# Altium PCB CDRon_PCB.PcbDoc
Units mil, origin at the board's own origin, x right, y up, seen from the top; angles counter-clockwise.
Board outline 3385 x 5400 mil, 2 copper layers (Top Layer, Bottom Layer); 12 components, 56 nets, 129 pads, 0 vias.
Unrouted connection lines stored in the file: 38.
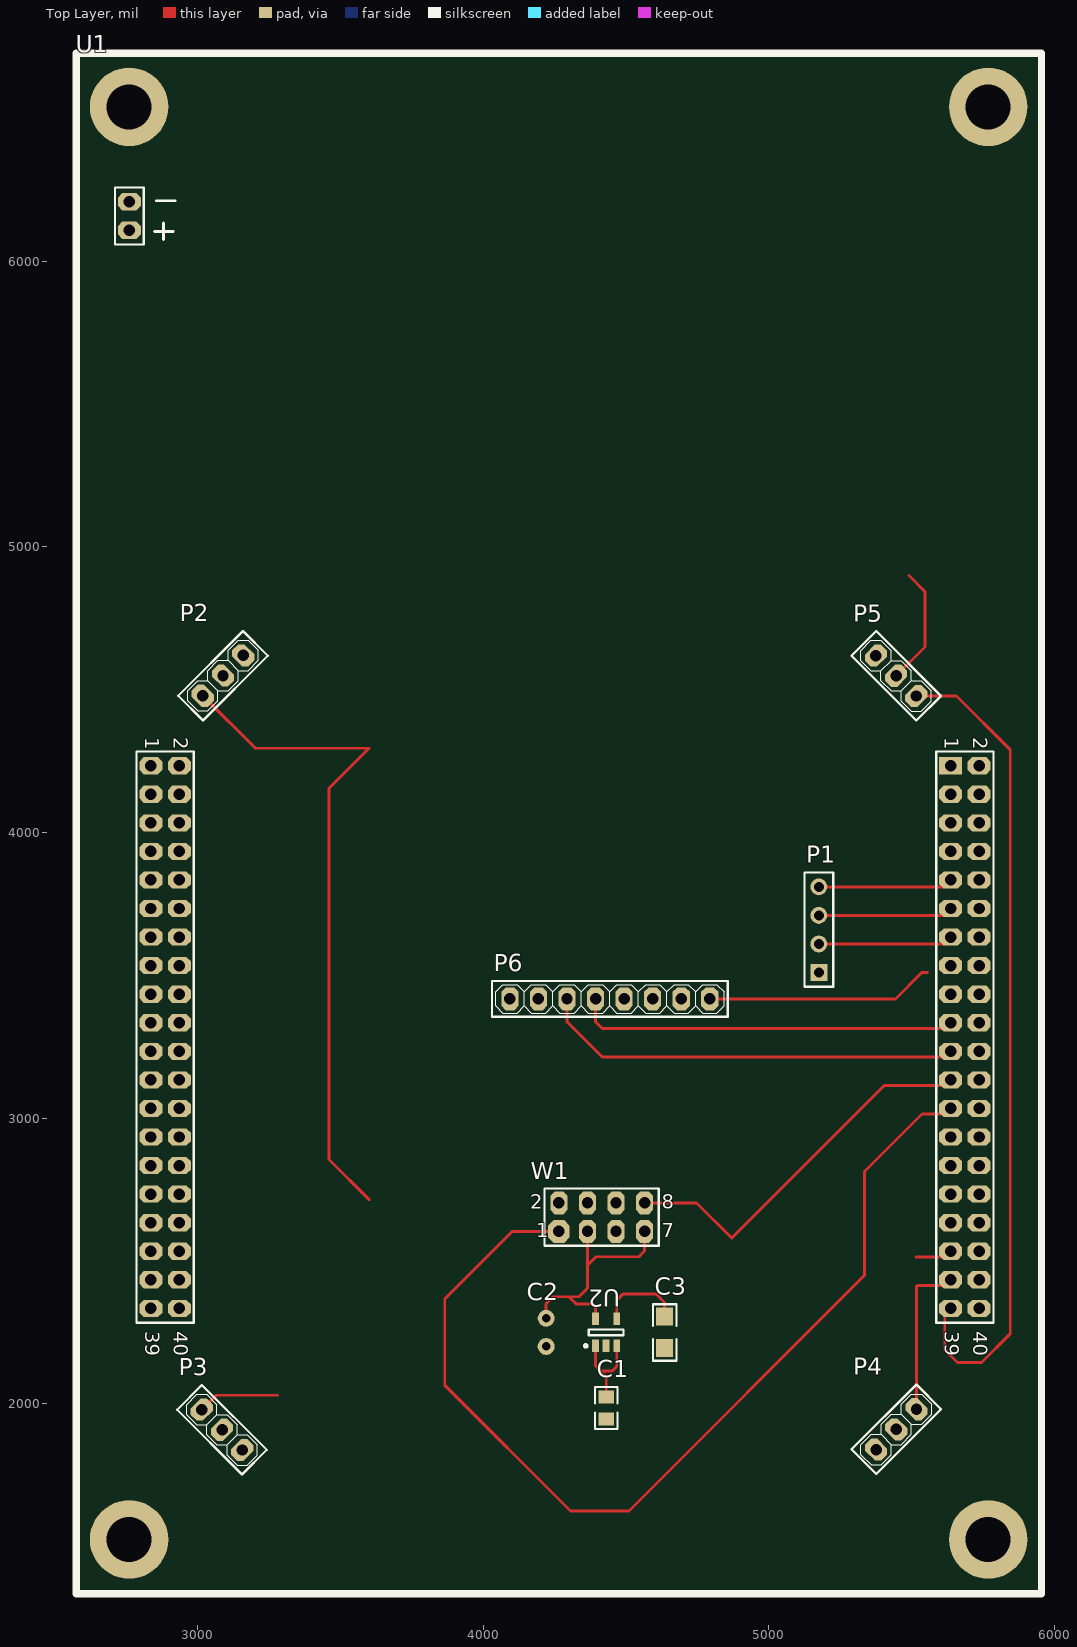
[diagram p0: Top Layer view]
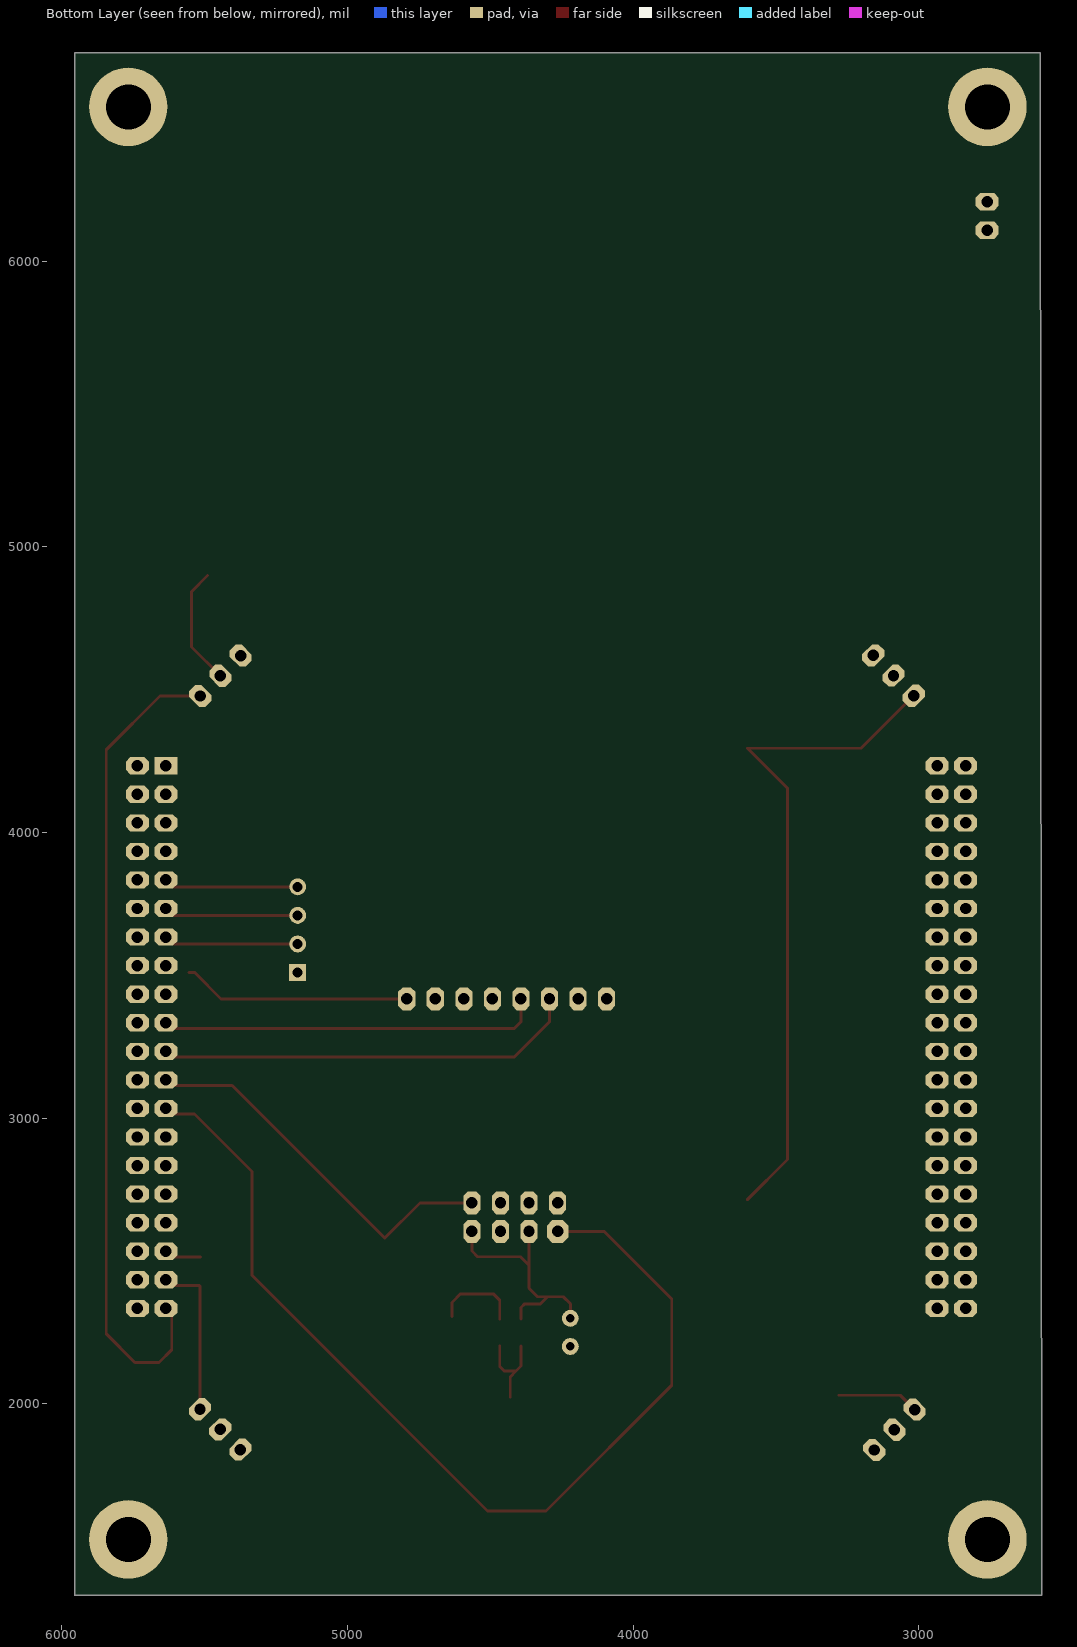
[diagram p1: Bottom Layer view, seen from below]

## Layer stack, top to bottom
Top Solder: solder mask 0.4, Solder Resist, Dk 3.5
Top Layer: signal copper 1.4
Dielectric 1: dielectric 12.6, FR-4, Dk 4.8
Bottom Layer: signal copper 1.4
Bottom Solder: solder mask 0.4, Solder Resist, Dk 3.5

## Board outline
2570,1330 5955,1330 5955,6730 2575,6730

## Design rules (kind name [scope] priority, off if disabled: settings)
Clearance [All] p1 off: gap=0
ComponentClearance [All] p1 off: gap=10 collisioncheckmode=3 verticalgap=10 showdistances=FALSE
PolygonConnect [All] p1: connectstyle=Relief reliefconductorwidth=10 reliefentries=4 polygonreliefangle="90 Angle" airgapwidth=10
RoutingVias [All] p1: holewidth=28 width=50 viastyle="Through Hole" minholewidth=28 minwidth=50 maxholewidth=28 maxwidth=50
SolderMaskExpansion [All] p1: expansion=4
Width [All] p1: maxlimit=10 minlimit=10 preferedwidth=10
29 further rules are at their usual default settings.

## Classes and differential pairs
component class CDRon_brushless: P2 P3 P4 P5
component class CDRon_IMU-BAT: P1 P6
component class CDRon_wifi: C1 C2 C3 U2 W1

## Components (designator, comment, footprint, x,y, rotation, side; value= is the part's Value field where it differs from the comment)
C1 "C1u" 0805 4430,1985 r90 top
C2 "C2.2u" TANTALUM 4220,2250 r270 top
C3 "C10n" "C 1206" 4635,2250 r90 top
P1 "Battery" HDR1X4 5175,3510 r90 top
P2 "ESC" ESC 3087.6,4549.29 r225 top
P3 "ESC" ESC 3085,1910 r135 top
P4 "ESC" ESC 5447.4,1910.71 r45 top
P5 "ESC" ESC 5445.71,4547.6 r315 top
P6 "GY-521" GY-521 4445,3415 r0 top
U1 "EDU-CIAA" EDU-CIAA 2575,1335 r0 top
U2 "LP2985-33DBVR" TI-DBV5_N 4430,2250 r90 top
W1 "ESP8266" ESP8266 4415,2650 r0 top

## Footprints (in the part's own frame and the unit in brackets; to place one, negate y for a bottom-side part, rotate by r counter-clockwise, add the part's x,y. Pads: shape width x height; smd on the part's side, far side on the other; paste and mask are expansions set on the pad)
0805 [mm]
  rect 1.15x1.4 smd: 1(-0.964,-0.019) 2(0.991,-0.019)
  silkscreen extent -1.85,-1.02 1.88,0.98, body extent -1.02,-0.62 0.98,0.63, height 0.78
"C 1206" [mm]
  rect 1.6x1.5 smd: 1(-1.4,0) 2(1.4,0)
  silkscreen extent -2.51,-1.05 2.5,1.03, body extent -1.54,-0.8 1.66,0.8, height 0.77
EDU-CIAA [mil]
  round 275 hole 157.48: 0(185.1,190) 0(185.1,5205.75) 0(3192.97,190) 0(3192.97,5205.75)
  rect 80x60 hole 40: 1(3061.07,2899.1)
  oct 80x60 hole 40: 2(3161.07,2899.1) 3(3061.07,2799.1) 4(3161.07,2799.1) 5(3061.07,2699.1) 6(3161.07,2699.1) 7(3061.07,2599.1) 8(3161.07,2599.1) 9(3061.07,2499.1) 10(3161.07,2499.1) 11(3061.07,2399.1) 12(3161.07,2399.1) 13(3061.07,2299.1) 14(3161.07,2299.1) 15(3061.07,2199.1) 16(3161.07,2199.1) 17(3061.07,2099.1) 18(3161.07,2099.1) 19(3061.07,1999.1) 20(3161.07,1999.1) 21(3061.07,1899.1) 22(3161.07,1899.1) 23(3061.07,1799.1) 24(3161.07,1799.1) 25(3061.07,1699.1) 26(3161.07,1699.1) 27(3061.07,1599.1) 28(3161.07,1599.1) 29(3061.07,1499.1) 30(3161.07,1499.1) 31(3061.07,1399.1) 32(3161.07,1399.1) 33(3061.07,1299.1) 34(3161.07,1299.1) 35(3061.07,1199.1) 36(3161.07,1199.1) 37(3061.07,1099.1) 38(3161.07,1099.1) 39(3061.07,999.1) 40(3161.07,999.1) 41(261.1,2899.1) 42(361.1,2899.1) 43(261.1,2799.1) 44(361.1,2799.1) 45(261.1,2699.1) 46(361.1,2699.1) 47(261.1,2599.1) 48(361.1,2599.1) 49(261.1,2499.1) 50(361.1,2499.1) 51(261.1,2399.1) 52(361.1,2399.1) 53(261.1,2299.1) 54(361.1,2299.1) 55(261.1,2199.1) 56(361.1,2199.1) 57(261.1,2099.1) 58(361.1,2099.1) 59(261.1,1999.1) 60(361.1,1999.1) 61(261.1,1899.1) 62(361.1,1899.1) 63(261.1,1799.1) 64(361.1,1799.1) 65(261.1,1699.1) 66(361.1,1699.1) 67(261.1,1599.1) 68(361.1,1599.1) 69(261.1,1499.1) 70(361.1,1499.1) 71(261.1,1399.1) 72(361.1,1399.1) 73(261.1,1299.1) 74(361.1,1299.1) 75(261.1,1199.1) 76(361.1,1199.1) 77(261.1,1099.1) 78(361.1,1099.1) 79(261.1,999.1) 80(361.1,999.1) 81(185.97,4773.86) 82(185.97,4873.86)
  silkscreen extent 0,0 3379,5394, body extent 0,0 3379,5395, height 335
ESC [mil]
  oct 60x80 hole 40: 1(-1.1,0.6) 2(-101.1,0.6) 3(98.9,0.6)
  silkscreen extent -161,-60 160,62
ESP8266 [mil]
  oct 75x80 hole 40: 1(-150.2,-46.6)
  oct 60x80 hole 40: 2(-150.2,53.4) 3(-50.2,-46.6) 4(-50.2,53.4) 5(49.8,-46.6) 6(49.8,53.4) 7(149.8,-46.6) 8(149.8,53.4)
  silkscreen extent -200,-97 200,103
GY-521 [mil]
  oct 60x80 hole 40: 1(-351.9,2.8) 2(-251.9,2.8) 3(-151.9,2.8) 4(-51.9,2.8) 5(48.1,2.8) 6(148.1,2.8) 7(248.1,2.8) 8(348.1,2.8)
  silkscreen extent -415,-60 411,66
HDR1X4 [mm] "Connector; Header; 4 Position"
  rect 1.5x1.5 hole 0.9: 1(0,0)
  round 1.5 hole 0.9: 2(2.54,0) 3(5.08,0) 4(7.62,0)
  silkscreen extent -1.27,-1.27 8.89,1.27
TANTALUM [mm]
  round 1.5 hole 0.75: 1(-1.25,0) 2(1.25,0)
  body extent -1.98,-1.98 1.98,1.98, height 7.39
TI-DBV5_N [mm] "SOT23, 5-Leads, Body 2.9x1.6mm, Pitch 0.95mm, IPC Medium Density"
  rect 1.1x0.6 smd: 1(-1.2,0.95) 2(-1.2,0) 3(-1.2,-0.95) 4(1.2,-0.95) 5(1.2,0.95)
  silkscreen extent -1.32,-1.55 0.25,1.92, body extent -0.87,-1.52 0.87,1.53, height 1.45

## Part data
C1 C3: library part C, "Cap ceramic"
C2: library part "C Tantalum", "Tantalum capacitor"
P1: library part "Header 4", "Header, 4-Pin"
U2: library part LP2985-10DBVR, "Single Output Low Noise LDO, 150 mA, Fixed 3.3 V Output, 2.2 to 16 V Input, with Low IQ, 5-pin SOT-23 (DBV), -40 to 125 degC, Green (RoHS & no Sb/Br)"

## Nets (pads, with @x,y where several pads share a name; then routed paths per layer and width w, separated by ;. In a path a pad name is that pad's centre, name@x,y a point inside that pad or via, vN(x,y) a via of type N, cw(c..) or ccw(c..) an arc to the next point about the centre after c; other vN are vias at no path point)
3V3: U1.1 U1.41
5V: U1.2 U1.42
232_RX: U1.23 W1.8 | length 1323.4
  Top Layer w10: W1.8 4746.6,2703.4 4870,2580 5404.17,3114.17 U1.23@5615.87,3114.17
232_TX: U1.25 W1.1 | length 3520.9
  Top Layer w10: W1.1 4101.6,2603.4 3865,2366.8 3865,2065 4305,1625 4510,1625 5335,2450 5335,2813.2 5535.97,3014.17 U1.25@5615.87,3014.17
CAN_RD: U1.27
CAN_TD: U1.29
CH1: P1.2 U1.13 | length 442.6
  Top Layer w10: P1.2 5611.69,3610 U1.13@5615.87,3614.17
CH2: P1.3 U1.11 | length 442.6
  Top Layer w10: P1.3 5611.69,3710 U1.11@5615.87,3714.17
CH3: P1.4 U1.9 | length 442.6
  Top Layer w10: P1.4 5611.69,3810 U1.9@5615.87,3814.17
CRS_DV: U1.50
DAC: U1.15
F_COL0: P5.3 U1.39 | length 2865.7
  Top Layer w10: P5.3 5656.91,4478.09 5845,4290 5845,2245 5745,2145 5660,2145 5615.87,2189.13 U1.39@5615.87,2314.17
GND: C1.1 C2.2 C3.1 P2.2 P3.2 P4.2 P5.2 P6.2 U1.20 U1.22 U1.24 U1.26 U1.28 U1.30 U1.32 U1.38 U1.40 U1.43 U1.45 U1.47 U1.51 U1.53 U1.57 U1.59 U1.65 U1.67 U1.77 U1.79 U1.82 U2.2 W1.2
GNDA: P1.1
GPIO0: U1.69
GPIO1: U1.72
GPIO2: U1.71
GPIO3: U1.74
GPIO4: U1.73
GPIO5: U1.76
GPIO6: U1.75
GPIO7: U1.78
GPIO8: P6.8 U1.80 | length 800.1
  Top Layer w10: P6.8 5442.8,3417.8 5535,3510 5555,3510
I2C_SCL: P6.3 U1.21 | length 1454
  Top Layer w10: P6.3 4293.1,3337.8 4416.73,3214.17 U1.21@5615.87,3214.17
I2C_SDA: P6.4 U1.19 | length 1312.6
  Top Layer w10: P6.4 4393.1,3337.8 4416.73,3314.17 U1.19@5615.87,3314.17
ISP: U1.5
LCD1: U1.70
LCD2: U1.68
LCD3: U1.66
LCD4: U1.62
LCD_EN: U1.63
LCD_RS: U1.64
MDC: U1.48
MDIO: U1.52
NetC3_2: C3.2 U2.4 | length 304.4
  Top Layer w10: U2.4 4467.4,2362.4 4490,2385 4605,2385 4635,2355 C3.2
REF_CLK: U1.55
RESET: U1.3
RXD0: U1.49
RXD1: U1.44
SPI_CLK: U1.60
SPI_MISO: U1.58
SPI_MOSI: U1.61
T_COL1: P2.3 U1.31 | length 2355.3
  Top Layer w10: P2.3 3202.02,4295 3600,4295 3460,4155 3460,2855 3600.83,2714.17
T_COL2: U1.34
T_FIL0: U1.33
T_FIL1: U1.36
T_FIL2: P4.3 U1.37 | length 530.7
  Top Layer w10: P4.3 5516.91,2411.91 5519.17,2414.17 U1.37@5615.87,2414.17
T_FIL3: P3.3 U1.35 | length 387.1
  Top Layer w10: P3.3 3065.13,2030 3280,2030 ; 5515,2514.17 U1.35@5615.87,2514.17
TX_EN: U1.46
TXD0: U1.54
TXD1: U1.56
VCC: P2.1 P6.1 U1.81
VDDA: U1.17
W3V3: C2.1 U2.5 W1.3 W1.7 | length 854.4
  Top Layer w10: C2.1 4220,2350 4245,2375 4300,2375 ; W1.3 4364.8,2485 ; U2.5 4392.6,2337.4 4380,2350 4325,2350 4300,2375 ; W1.7 4564.8,2534.8 4545,2515 4394.8,2515 4364.8,2485 ; 4300,2375 4335,2375 4364.8,2404.8 4364.8,2485
W5V: C1.2 P4.1 U2.1 U2.3 | length 330.4
  Top Layer w10: U2.1 4392.6,2132.4 4410,2115 ; C1.2 4430.75,2094.25 4410,2115 ; U2.3 4467.4,2130.91 4451.5,2115 4410,2115
WAKEUP: U1.6
pads on no net: P3.1 P5.1 P6.5 P6.6 P6.7 U1.0 U1.4 U1.7 U1.8 U1.10 U1.12 U1.14 U1.16 U1.18 W1.4 W1.5 W1.6
copper on no net: | length 416.5
  Top Layer w10: 5445.35,4548.8 5546.56,4650 5546.56,4843.44 5490,4900

## Text inside footprints (layer, text, board x,y; h text height)
U1: Top Overlay "2" at 5716.07,4334.1 h50 r270; Top Overlay "39" at 5616.07,2254.1 h50 r270; Top Overlay "1" at 5616.07,4334.1 h50 r270; Top Overlay "40" at 5716.07,2254.1 h50 r270; Top Overlay "2" at 2916.1,4334.1 h50 r270; Top Overlay "39" at 2816.1,2254.1 h50 r270; Top Overlay "1" at 2816.1,4334.1 h50 r270; Top Overlay "40" at 2916.1,2254.1 h50 r270
W1: Top Overlay "8" at 4624.8,2683.4 h50; Top Overlay "7" at 4624.8,2583.4 h50; Top Overlay "1" at 4184.8,2583.4 h50; Top Overlay "2" at 4164.8,2683.4 h50